# Altium PCB egg.PcbDoc (part 3 of 3)
Units mil, origin at the board's own origin, x right, y up, seen from the top; angles counter-clockwise.
Board outline 3110.24 x 2637.8 mil, 4 copper layers (Top Layer, GND, PWR, Bottom Layer), stack 30.634 mil thick; 262 components, 132 nets, 710 pads, 642 vias.
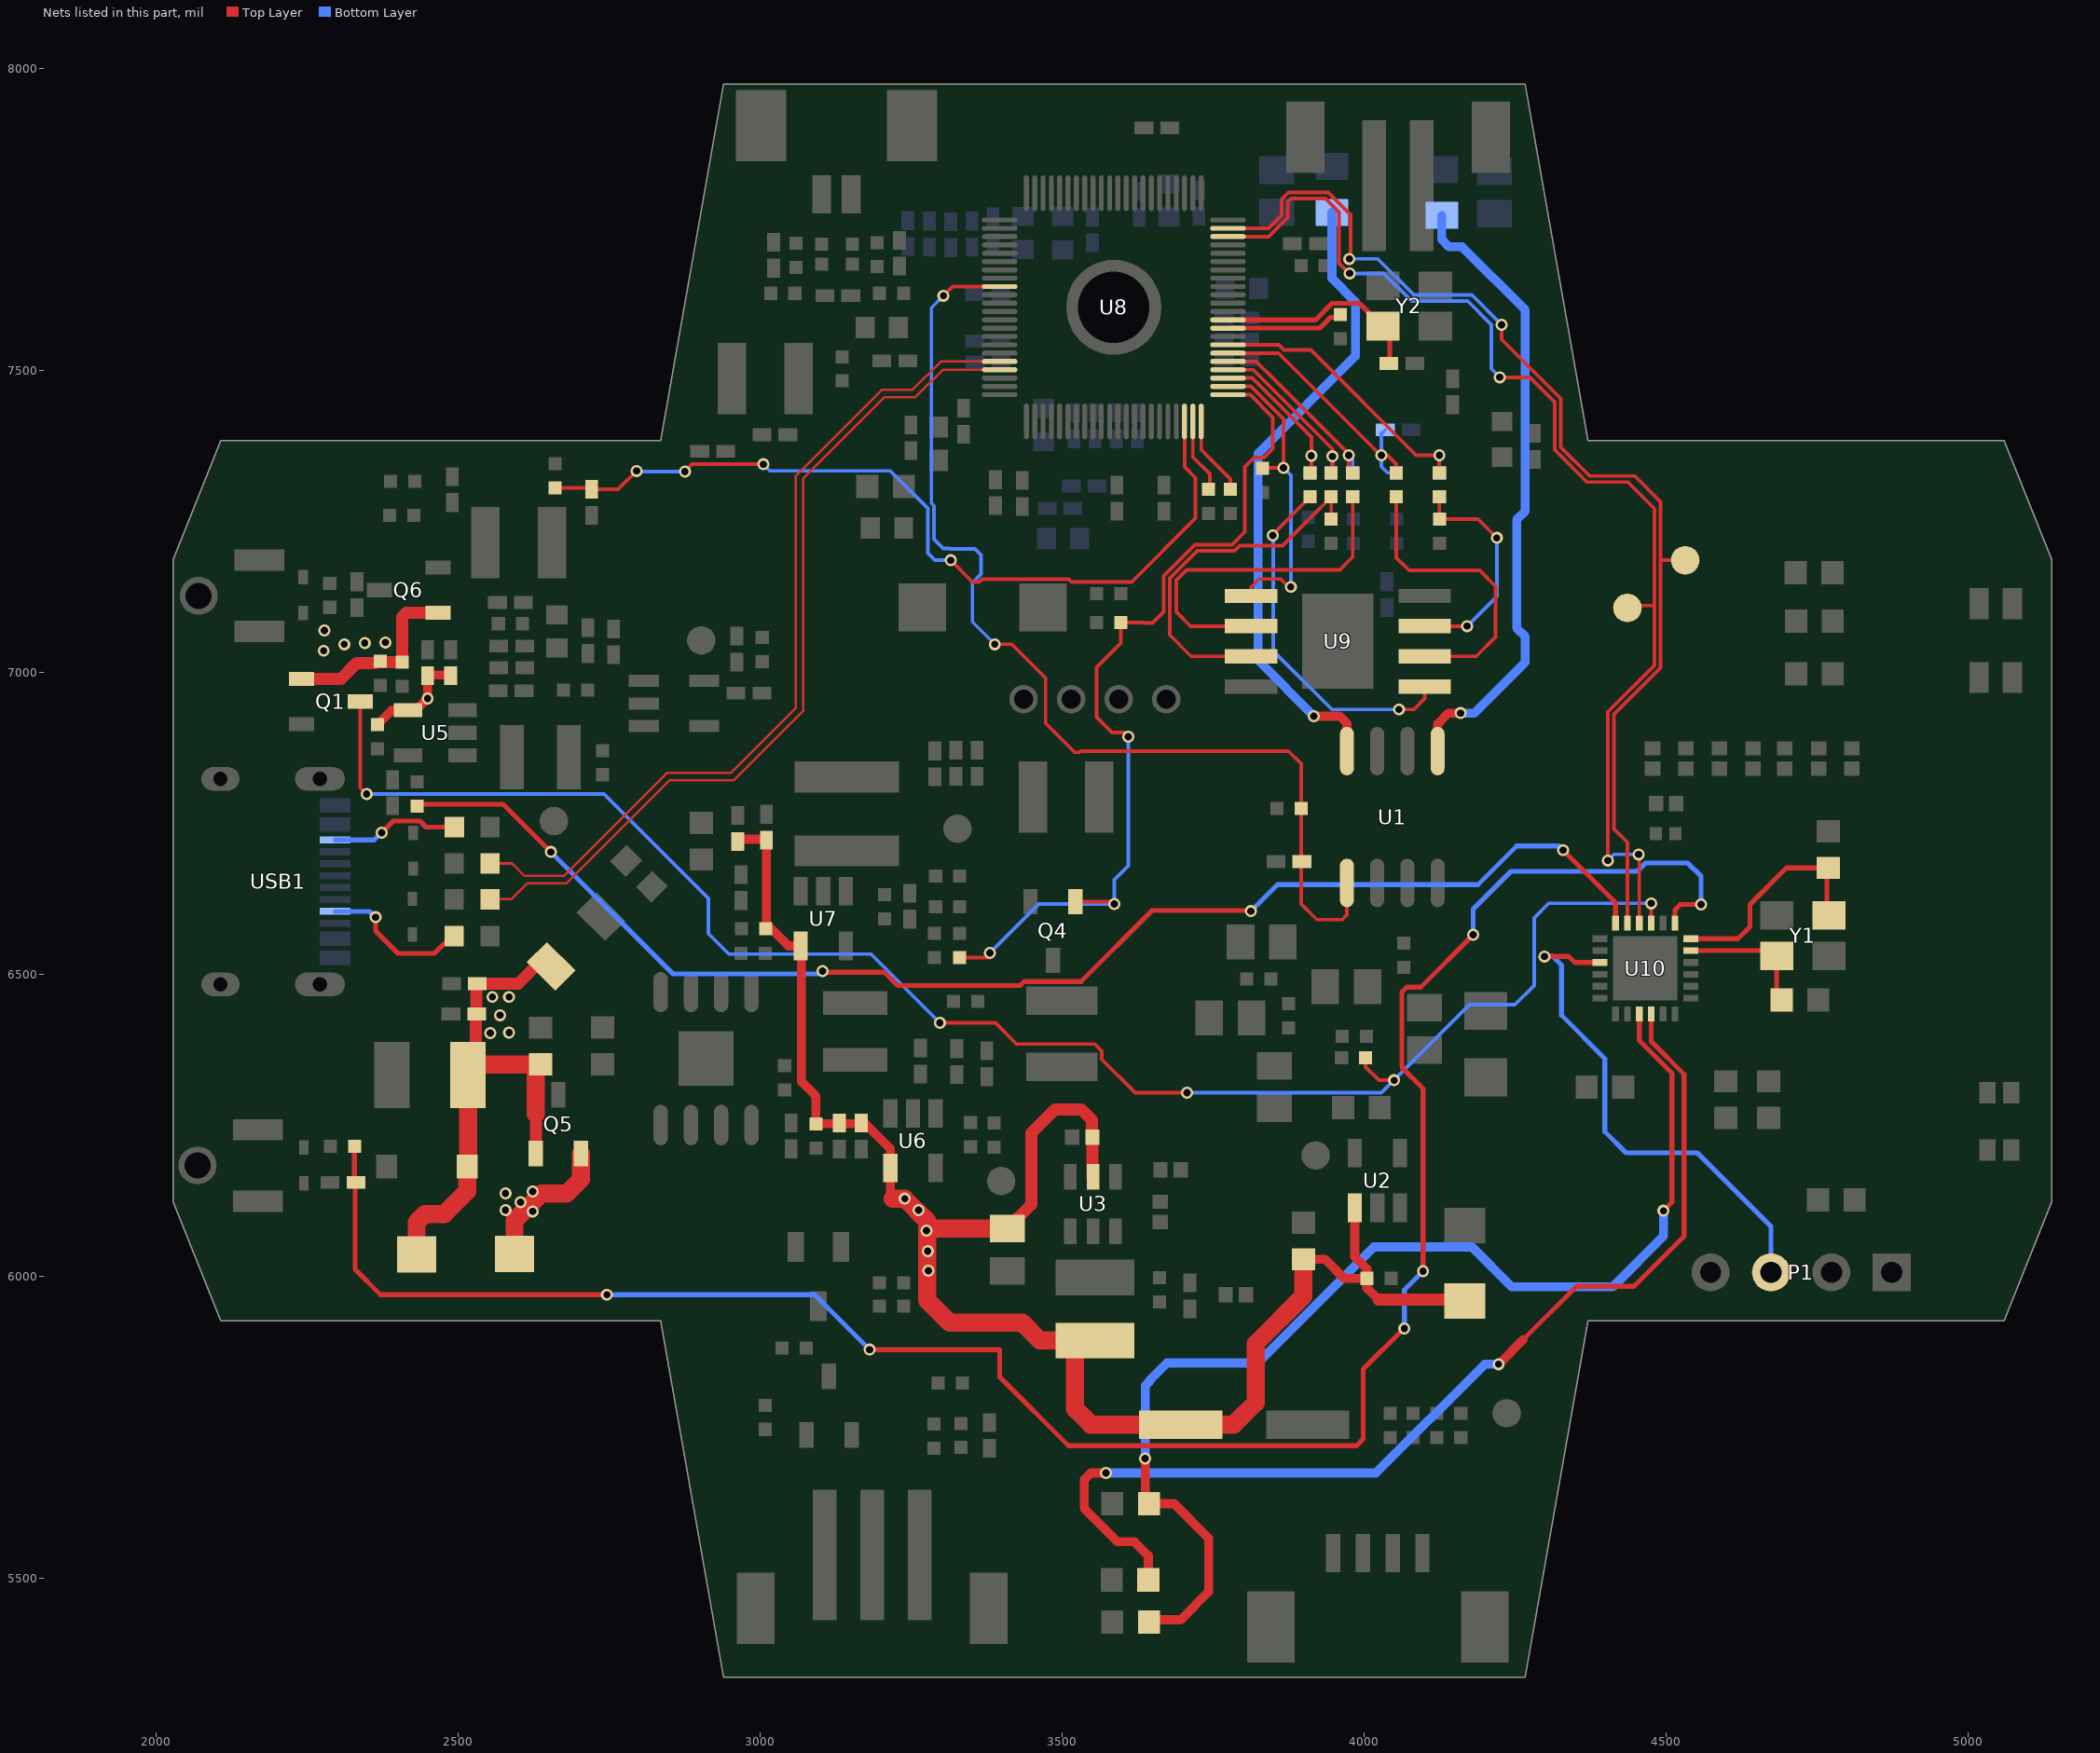
[diagram p5: the nets of this part, all layers, seen from the top]

## Via types
v1: diameter 20, hole 12, Top Layer to Bottom Layer, tented both sides, 642 vias

## Nets (pads, with @x,y where several pads share a name; then routed paths per layer and width w, separated by ;. In a path a pad name is that pad's centre, name@x,y a point inside that pad or via, vN(x,y) a via of type N, cw(c..) or ccw(c..) an arc to the next point about the centre after c; other vN are vias at no path point) (continued)
NTC_AD: C105.2 R79.2 U10.9 | length 1942.5
  Top Layer w8: U10.9@4456,6434 4456,6389.97 4510,6335.97 4510,6122 v1(4496,6108)
  Top Layer w15: v1(3638,5698) 3638,5630.81 3645,5623.81 C105.2@3644.19,5623 3686,5623 3743,5566 3743,5477 3697,5431 3648.37,5431 R79.2@3644.19,5426.82
  Bottom Layer w15: v1(3638,5698) 3638,5818.19 3645,5825.19 3644.19,5826 3674,5855.81 3824.19,5855.81 4016.38,6048 4179,6048 4245,5982 4412,5982 4496,6066 v1(4496,6108)
NTC_CON: R78.1 U10.10 | length 1776.8
  Top Layer w8: 4264,5895 4352,5983 4447,5983 4530,6066 4530,6334 4475.7,6388.3 U10.10@4475.7,6434
  Top Layer w15: v1(3573,5674) 3548,5674 3537.18,5663.18 3537.18,5614.82 3592,5560 3620,5560 3643.19,5536.81 R78.1@3643.19,5496.82 ; v1(4223,5854) 4264,5895
  Bottom Layer w15: v1(3573,5674) 4020,5674 4200,5854 v1(4223,5854)
PM_GPIO4: Q4.1 R46.1 R48.1 U8.23 | length 1498.3
  Top Layer w6: R46.1@3331,6527 v1@3381,6527 ; Q4.1@3526.57,6616 Q4.1@3522.66,6619.91 3583.09,6619.91 v1(3587,6616) ; v1(3610,6893) 3603.3,6899.7 3583.26,6899.7 3557.63,6925.33 3557.63,7007.89 3597.63,7047.89 R48.1@3597.63,7082 3634.96,7082 3635.96,7081 3650.04,7081 3668.43,7099.38 3668.43,7159.17 3720.25,7211 3782,7211 3803,7232 3803,7339.55 3818.27,7354.83 3834.68,7354.83 3849.46,7369.61 3849.46,7421.54 3811.9,7459.1 U8.23@3775,7459.1
  Bottom Layer w6: v1(3381,6535) 3462,6616 v1(3587,6616) 3587,6656 3610,6679 v1(3610,6893)
PM_RESET: C86.2 R55.1 U8.20 | length 1420.6
  Top Layer w6: R55.1@2661,7304.97 2714.6,7304.97 C86.2@2721.63,7312 ; C86.2@2721.63,7302.46 2765.46,7302.46 v1(2796,7333) ; v1(2876,7332) 2888,7344 v1(3006,7344) ; v1(3315.96,7185) 3351.96,7149 3363.1,7149 3367.47,7153.37 3511.27,7153.37 3515.64,7149 3615.83,7149 3721.36,7254.53 3721.36,7321.47 3703.15,7339.68 U8.20@3703.15,7414.81
  Bottom Layer w6: v1(2796,7333) 2797,7332 v1(2876,7332) ; v1(3006,7344) 3017,7333 3216,7333 3278,7271 3278,7197 3290,7185 v1(3315.96,7185)
PM_SPI_CZ: R70.2 U8.24 U9.1 | length 524.1
  Top Layer w6: U8.24@3775,7472.88 3813.12,7472.88 3866.87,7419.13 v1(3866.87,7338) 3833,7338 R70.2@3832,7337 ; U9.1@3813.3,7126 3813.3,7140.92 3826.38,7154 3862,7154 3875.08,7140.92 v1(3879,7140.92)
  Bottom Layer w6: v1(3866.87,7338) 3879,7325.87 v1(3879,7140.92)
PM_SPI_DI: R60.1 R84.2 U8.25 | length 267.2
  Top Layer w6: U8.25@3775,7486.66 3815.01,7486.66 3913,7388.67 v1(3913,7358) 3913,7331.86 R60.1@3911.02,7329.87
  Bottom Layer w6: R84.2@3911.02,7329.87 3913,7331.86 v1(3913,7358)
PM_SPI_DO: R62.1 R65.2 U8.27 | length 329.1
  Top Layer w6: U8.27@3775,7514.22 3821.78,7514.22 3849,7487 ; 3849,7486.96 3858.96,7477 ; 3859,7477 3975,7361 v1(3975,7359) 3975,7336.38 R62.1@3981.51,7329.87
  Bottom Layer w6: v1(3975,7359) 3981.51,7352.49 R65.2@3981.51,7329.87
PM_SPI_HOLD: R66.1 R85.2 U8.29 | length 484
  Top Layer w6: U8.29@3775,7541.78 3859.18,7541.78 3867.96,7533 3912.43,7533 4086.43,7359 v1(4125,7359) R66.1@4125,7329.87
  Bottom Layer w6: R85.2@4125,7329.87 v1(4125,7359)
PM_SPI_SCK: C98.2 R58.1 R83.2 U8.28 | length 462
  Top Layer w6: U8.28@3775,7528 3858.82,7528 3864.82,7522 4027.82,7359 v1(4029,7359) 4039,7359 4053.85,7344.15 R58.1@4053.85,7329.87
  Bottom Layer w6: C98.2@4035.54,7401 4029,7394.46 v1(4029,7359) 4029,7340 4039.13,7329.87 R83.2@4053.85,7329.87
PM_SPI_WPZ: R61.2 R64.1 U8.26 | length 295.5
  Top Layer w6: U8.26@3775,7500.44 3816.84,7500.44 3948,7369.28 v1(3948,7357) 3948,7331.9 R64.1@3945.97,7329.87
  Bottom Layer w6: R61.2@3945.97,7329.87 3948,7331.9 v1(3948,7357)
POWER_EN: R38.2 U10.24 | length 2287.5
  Top Layer w8: R38.2@2433,6778 2436,6781 2575,6781 v1(2654,6702) ; v1(3104,6505) 3106.17,6502.83 3206.17,6502.83 3228,6481 3431.19,6481 3437.69,6487.5 3531.75,6487.5 3649.25,6605 3812,6605 v1(3813,6604) ; v1@4330,6710 v1(4330,6705) 4416.7,6618.3 U10.24@4416.7,6584.5
  Bottom Layer w8: v1(2654,6702) 2856,6500 3099,6500 v1(3104,6505) ; v1(3813,6604) 3857,6648 4189,6648 4253,6712 4323,6712 v1(4330,6705)
RESET: C32.2 R25.2 U10.19 | length 3552
  Top Layer w8: R25.2@2329,6215 2329,6156 2330,6155 2330,6011 2372,5969 v1(2747,5969) ; v1(3182,5878) 3397.05,5878 3397.05,5832.83 3510.87,5719 3988,5719 3999,5730 3999,5846 v1@4065,5912 ; v1(4098,6008) 4098,6310.32 4063.74,6344.57 4063.74,6347.13 4063.06,6347.81 4063.06,6470.19 4071.05,6478.17 4094.17,6478.17 v1(4181,6565) ; U10.19@4515.1,6584.5 4515.1,6606.1 4524,6615 v1(4558,6615)
  Bottom Layer w8: v1(2747,5969) 3091,5969 v1(3182,5878) ; v1(4067,5913) 4067,5977 v1(4098,6008) ; v1(4181,6565) 4181,6607.6 4243.4,6670 4452.46,6670 4466.46,6684 4536,6684 4558,6662 v1(4558,6615)
RX_SOC: RX.1 U8.42 U10.22 | length 1928.6
  Top Layer w6: U8.42@3775,7720.91 3842.36,7720.91 3873.65,7752.2 3873.65,7778.43 3879.22,7783.99 3936.63,7783.99 3959,7761.62 3959,7676.96 3975.96,7660 v1(3976.5,7660) ; v1(4225,7488) 4275,7488 4316,7447 4316,7368 4369.46,7314.54 4437.07,7314.54 4481,7270.61 4481,7110 ; v1(4404.07,6688) 4404,6688.07 4404,6934.14 4481,7011.14 4481,7110 ; RX.1@4436.3,7106 4440.3,7110 4481,7110 ; v1(4455,6698) 4456,6697 U10.22@4456,6584.5
  Bottom Layer w6: v1(3976.5,7660) 4032.86,7660 4078.86,7614 4172,7614 4211,7575 4211,7502 v1(4225,7488) ; v1(4404.07,6688) 4414.07,6698 v1(4455,6698)
SPI_FLASH-HOLD: R66.2 R68.2 U9.7 | length 381
  Top Layer w6: U9.7@4100.7,7076 v1(4171,7076) ; R66.2@4125,7289.87 4125,7253.49 R68.2@4125.49,7253 4189,7253 v1(4220,7222)
  Bottom Layer w6: v1(4171,7076) 4220,7125 v1(4220,7222)
SPI_FLASH-SCK: R58.2 U9.6 | length 498.8
  Top Layer w6: R58.2@4053.85,7289.87 4053.85,7189.15 4074.86,7168.14 4191.63,7168.14 4218,7141.77 4218,7058 4186,7026 U9.6@4100.7,7026
SPI_FLASH-SDI: R60.2 U9.5 | length 599.3
  Top Layer w6: v1(3849,7226) 3849,7227.86 R60.2@3911.02,7289.87 ; v1(4058,6938) 4082.7,6938 4100.7,6956 U9.5@4100.7,6976
  Bottom Layer w6: v1(3849,7226) 3849.87,7225.13 3849.87,7035.13 3947,6938 v1(4058,6938)
SPI_FLASH-SDO: R62.2 U9.2 | length 593.4
  Top Layer w6: U9.2@3813.3,7076 3713,7076 3689.37,7099.63 3689.37,7151.83 3706.54,7169 3960,7169 3981.51,7190.51 R62.2@3981.51,7289.87
SPI_FLASH-WPN: R64.2 R67.2 U9.3 | length 650.7
  Top Layer w6: U9.3@3813.3,7026 3713.84,7026 3678.43,7061.41 3678.43,7155.03 3724.39,7201 3786.14,7201 3794.14,7209 3865.1,7209 R64.2@3945.97,7289.87 ; 3912.55,7256.45 R64.2@3945.97,7289.87 ; R67.2@3945.97,7253 R64.2@3945.97,7289.87
SPK_OUTN: L3.1 U1.5 | length 1053.4
  Top Layer w15: U1.5@4122,6869.15 4122,6914 4140,6932 v1(4160,6932)
  Bottom Layer w15: L3.1@4129,7755.96 4129,7716 4141,7704 4162.41,7704 4267,7599.41 4267,7266.19 4253,7252.19 4253,7073 4267,7059 4267,7016 4183,6932 v1(4160,6932)
SPK_OUTP: L2.1 U1.8 | length 1060.6
  Top Layer w15: v1(3917.2,6927) 3960,6927 3972,6915 U1.8@3972,6869.15
  Bottom Layer w15: v1(3917.2,6927) 3825,7019.2 3825,7362 3986,7523 3986,7613 3947,7652 L2.1@3947,7760.96
SPK_SHDN: C8.1 R4.1 U1.1 U8.75 | length 1781.2
  Top Layer w6: v1(3304,7623) 3319.24,7638.24 U8.75@3397.05,7638.24 ; v1(3389,7046) 3417,7046 3473,6990 3473,6915 3521,6867 3529.46,6867 3531.46,6869 3875,6869 3896,6848 R4.1@3896,6774 3896,6616.11 3922.11,6590 3964.09,6590 3972,6597.91 U1.1@3972,6650.85
  Bottom Layer w6: v1(3304,7623) 3284,7603 3284,7279.14 3288,7275.14 3288,7220 3303.43,7204.57 3313.57,7204.57 3314.14,7204 3356.04,7204 3366,7194.04 3366,7161.89 3352,7147.89 3352,7083 v1(3389,7046) v1@3388,7045
SWS: P1.3 U10.3 | length 851.4
  Top Layer w8: v1(4299,6529) 4339,6529 4348.9,6519.1 U10.3@4390.6,6519.1
  Bottom Layer w8: v1(4299,6529) 4313,6529 4327,6515 4327,6432 4399.02,6359.98 4399.02,6238.98 4434,6204 4552,6204 4674,6082 P1.3@4674,6006
TX_SOC: TX.1 U8.43 U10.23 | length 1854.5
  Top Layer w6: U8.43@3775,7734.69 3842,7734.69 3863.65,7756.35 3863.65,7782.57 3875.08,7793.99 3940.77,7793.99 3978,7756.76 3978,7686 v1(3976,7684) ; v1(4228,7575) 4228,7550.62 4326,7452.62 4326,7372.15 4373.61,7324.54 4448.46,7324.54 4491,7282 4491,7185.16 ; U10.23@4436.3,6584.5 4436.3,6718.06 4414,6740.36 4414,6930 4491,7007 4491,7185.16 ; TX.1@4532,7185.16 4491,7185.16
  Bottom Layer w6: v1(3976,7684) 4023,7684 4083,7624 4179,7624 v1(4228,7575)
UART_RX0: R56.2 U8.21 | length 124.9
  Top Layer w6: U8.21@3716.93,7414.81 3716.93,7355.88 3745,7327.81 3745,7304.75 R56.2@3742.7,7302.45
UART_TX0: R57.2 U8.22 | length 132.4
  Top Layer w6: U8.22@3730.71,7414.81 3730.71,7368 3743.71,7355 3779,7319.71 R57.2@3779,7302.45
USB5V_BAT+: C15.2 C28.1 C29.2 C30.2 C37.2 C38.2 C43.2 C44.2 C53.2 C54.2 D8.2 L1.1 L7.2 Q5.2 R6.1 R30.2 R32.2 R41.2 U2.1 U3.2 U5.4 U6.4 U7.4 | length 3343.1
  Top Layer w15: R30.2@2367,6913 2390.73,6936.73 U5.4@2417.62,6936.73 2430.73,6936.73 v1(2450.05,6956.05) C37.2@2450.05,6995.26 ; C37.2@2450.08,6995.23 C38.2@2488.05,6995.23 ; C54.2@2963.5,6721 2965.5,6723 3011,6723 C53.2@3011,6721.54 3011,6576 R41.2@3010,6575 3018.85,6575 3047.4,6546.45 U7.4@3067.6,6546.45 3069,6545.05 3069,6322 3092.83,6298.17 R32.2@3092.83,6251.98 3175.02,6251.98 3216.1,6210.9 U6.4@3216.1,6178.62 3216.1,6131.9 3220,6128 ; C15.2@3900,6027.69 3935.62,6027.69 3967.3,5996 R6.1@4005,5996 ; U2.1@3984.93,6112.83 3984.93,6031.93 4005,6011.86 R6.1@4005,5996 ; 4024,5961 4005,5980 R6.1@4005,5996
  Top Layer w20: C29.2@3410,6078.72 3449.57,6118.29 3449.57,6236.57 3489,6276 3532,6276 3550,6258 3550,6230.73 C30.2@3550.73,6230 3550.73,6165.28 U3.2@3551.6,6164.42 ; 4024,5961 4164.3,5961 L1.1@4167,5958.3
  Top Layer w30: D8.2@2593.94,6036.39 2593.94,6091.94 2638.23,6136.23 2680,6136.23 2703.88,6160.11 Q5.2@2703.88,6202.69 ; 3220,6128 v1(3240,6128) 3277,6091 ; C29.2@3410,6078.72 3277,6078.72 3277,5959.9 3313.9,5923 3434,5923 3463.84,5893.16 L7.2@3555,5893.16 ; L7.2@3521.92,5865 3521.92,5780.08 3548.1,5753.9 C28.1@3696.9,5753.9 3784.63,5753.9 3821,5790.27 3821,5888 3900,5967 C15.2@3900,6027.69
  other v1: 3279,6008.8 3278,6041 3276,6075 2624,6107 2579,6109 3263,6109 2604,6122 2579,6137 2624,6139.68
USB_5V: C101.1 C102.1 D7.1 D8.1 F1.2 Q1.1 Q5.1 Q6.1 R11.1 R74.2 R75.2 R82.1 | length 1217.6
  Top Layer w20: Q1.1@2241.29,6988.66 2306.66,6988.66 2333,7015 2365,7015 2366,7016 R82.1@2408,7016 ; R82.1@2408,7017.87 2408,7091.34 2414.74,7098.08 Q6.1@2467.31,7098.08 ; F1.2@2516.98,6333 2530,6346.02 2530,6434 2531,6435 2531,6484 2600,6484 2628.67,6512.67 R74.2@2654.67,6512.67 ; 2628.74,6268.4 2629.08,6268.06 Q5.1@2629.08,6202.69
  Top Layer w30: D8.1@2431.94,6035.39 2431.94,6088.94 2445.74,6102.74 2477.74,6102.74 2515.59,6140.59 D7.1@2515.59,6181.1 2516.98,6182.49 F1.2@2516.98,6333 ; F1.2@2530,6346.02 2534.35,6350.37 R75.2@2637,6350.37 2628.74,6342.11 2628.74,6268.4
  other v1: 2554,6402 2585,6403 2569.83,6431.74 2557.26,6462 2585,6462 2278,7035.26 2312,7046 2346,7048 2380,7049 2279,7069
USB_CC1: R76.1 USB1.A5 | length 247.8
  Top Layer w8: v1(2364,6594) 2364,6571 2401,6534 2461.33,6534 R76.1@2490.33,6563
  Bottom Layer w8: USB1.A5@2296.88,6603.79 2354.21,6603.79 v1(2364,6594)
USB_CC2: R77.1 USB1.B5 | length 211
  Top Layer w8: v1(2374,6734) 2393.34,6753.34 2437.19,6753.34 2447.52,6743 R77.1@2490.54,6743
  Bottom Layer w8: USB1.B5@2296.88,6721.9 2361.9,6721.9 v1(2374,6734)
USB_DEC: Q1.3 R7.2 U10.21 | length 2836.7
  Top Layer w6: Q1.3@2338.54,6951.26 2338.54,6808.46 v1(2349,6798) ; v1(3298,6419) 3390,6419 3425,6384 3554.4,6384 3566,6372.4 3566,6358.54 3621.3,6303.24 v1(3707.13,6303.24) ; R7.2@4003,6361.13 4003,6346 4025,6324 v1(4050,6324) ; U10.21@4475.7,6584.5 v1(4475.7,6617)
  Bottom Layer w6: v1(2349,6798) 2742.3,6798 2915,6625.3 2915,6566.96 2948.96,6533 3184,6533 v1(3298,6419) ; v1(3707.13,6303.24) 4029.24,6303.24 v1(4050,6324) ; v1@4045.89,6328.11 v1(4050,6324) ; v1(4475.7,6617) 4306,6617 4282,6593 4282,6481 4250,6449 4175,6449 v1(4050,6324)
USB_DM: R71.2 U8.84 | length 1426.2
  Top Layer w4: R71.2@2557.26,6683 2590,6683 2610.5,6662.5 2675.68,6662.5 2846.18,6833 2952,6833 3059.6,6940.6 3059.6,7324.97 3201.63,7467 3252.31,7467 3299.53,7514.22 U8.84@3397.05,7514.22
USB_DP: R73.2 U8.85 | length 1428
  Top Layer w4: R73.2@2557.26,6623.86 2588.86,6623.86 2615.5,6650.5 2680.65,6650.5 2851.15,6821 2956.97,6821 3071.6,6935.63 3071.6,7097.13 3071.6,7320 3206.6,7455 3257.28,7455 3302.72,7500.44 U8.85@3397.05,7500.44
XC1: C22.2 U10.18 Y1.1 | length 378.3
  Top Layer w8: U10.18@4541.1,6558.4 4619.4,6558.4 4639,6578 4639,6615.11 4699.57,6675.69 C22.2@4766.69,6675.69 ; C22.2@4769,6675.69 C22.2@4766.69,6675.69 ; Y1.1@4770,6597 4766.69,6600.31 C22.2@4766.69,6675.69
XC2: C23.2 U10.17 Y1.3 | length 244.8
  Top Layer w8: U10.17@4541.1,6538.8 4670.88,6538.8 Y1.3@4683.38,6526.3 ; Y1.3@4683.38,6530.07 Y1.3@4683.38,6526.3 ; C23.2@4688.69,6444 4683.38,6449.31 Y1.3@4683.38,6526.3 ; Y1.3@4689.82,6519.85 Y1.3@4683.38,6526.3
XTALI: R53.2 U8.31 | length 195.5
  Top Layer w8: U8.31@3775,7569.34 3775.2,7569.53 3927.1,7569.53 3944.97,7587.41 3957.18,7587.41 R53.2@3961.31,7591.53
XTALO: C72.2 U8.32 Y2.1 | length 349.9
  Top Layer w8: U8.32@3775,7583.12 3919.93,7583.12 3947.17,7610.36 3992.64,7610.36 4030.47,7572.53 Y2.1@4031.69,7572.53 4043,7561.23 C72.2@4043,7511
pads on no net: CON3.4 CON3.5 CON4.5 CON4.6 MIC.3 MIC.4 P1.1 SPK.3 SPK.4 U1.3 U2.4 U4.4 U8.3 U8.4 U8.13 U8.14 U8.17 U8.34 U8.35 U8.36 U8.37 U8.44 U8.45 U8.47 U8.48 U8.50 U8.51 U8.52 U8.53 U8.54 U8.55 U8.56 U8.57 U8.58 U8.59 U8.60 U8.61 U8.62 U8.63 U8.64 U8.65 U8.73 U8.77 U8.78 U8.79 U8.80 U8.81 U8.82 U10.25 U11.6 USB1.A8 USB1.B8

## Polygon pours and split planes (outlines as drawn)
DGND on Top Layer "Top Layer-DGND" (solid, remove dead copper, pour order 22): 2940,7973 2860,7519.3 2835.87,7382.45 2107.52,7382.45 2066.63,7280.2 2028.78,7185.6 2028.78,6122.63 2107.52,5925.76 2835.87,5925.76 2915,5478.2 2940,5335.2 4267.17,5335.2 4345,5776.58 4371.3,5925.76 4837,5925.76 4837,7382.45 4371.3,7382.45 4303,7765.2 4267.17,7973 2940,7973 2937.8,7975.2
DGND on Bottom Layer "Bottom Layer-DGND" (solid, remove dead copper, pour order 20): 2940,7974 2860,7520.3 2835.87,7383.45 2107.52,7383.45 2066.63,7281.2 2028.78,7186.6 2028.78,6123.63 2107.52,5926.76 2835.87,5926.76 2915,5479.2 2940,5336.2 4267.17,5336.2 4345,5777.58 4371.3,5926.76 4840,5926.76 4840,7383.45 4371.3,7383.45 4303,7766.2 4267.17,7974 2940,7974 2937.8,7976.2
no net on Mechanical 1 (solid): 1991,7321
DGND on GND (split plane): 4351.47,7379.35 4351.52,7379.14 4351.55,7378.92 4352.05,7377.25 4352.53,7375.56 4352.63,7375.36 4352.69,7375.15 4353.52,7373.61 4354.31,7372.05 4354.44,7371.87 4354.55,7371.68 4355.66,7370.32 4356.74,7368.95 4356.91,7368.8 4357.05,7368.63 4358.4,7367.52 4359.73,7366.38 4359.92,7366.27 4360.09,7366.13 4361.63,7365.31 4363.16,7364.45 4363.37,7364.38 4363.57,7364.28 4365.24,7363.77 4366.91,7363.22 4367.13,7363.2 4367.34,7363.13 4369.08,7362.96 4370.82,7362.75 4371.04,7362.77 4371.26,7362.75 4831,7362.75 4831,5946.25 4371.26,5946.25 4371.04,5946.23 4370.82,5946.24 4369.08,5946.03 4367.34,5945.86 4367.13,5945.8 4366.91,5945.77 4365.24,5945.23 4363.57,5944.72 4363.37,5944.61 4363.16,5944.55 4361.63,5943.69 4360.09,5942.86 4359.92,5942.72 4359.73,5942.61 4358.4,5941.47 4357.05,5940.36 4356.91,5940.19 4356.74,5940.05 4355.66,5938.67 4354.55,5937.32 4354.44,5937.12 4354.31,5936.95 4353.52,5935.39 4352.69,5933.84 4352.63,5933.63 4352.53,5933.43 4352.05,5931.75 4351.55,5930.07 4351.52,5929.85 4351.47,5929.64 4250.26,5355.7 2956.82,5355.7 2855.62,5929.64 2855.56,5929.85 2855.53,5930.07 2855.03,5931.75 2854.55,5933.43 2854.45,5933.63 2854.39,5933.84 2853.56,5935.39 2852.77,5936.95 2852.64,5937.12 2852.53,5937.32 2851.42,5938.67 2850.34,5940.05 2850.17,5940.19 2850.03,5940.36 2848.68,5941.47 2847.35,5942.61 2847.16,5942.72 2846.99,5942.86 2845.45,5943.69 2843.92,5944.55 2843.71,5944.61 2843.51,5944.72 2841.84,5945.23 2840.17,5945.77 2839.95,5945.8 2839.74,5945.86 2838,5946.03 2836.26,5946.24 2836.04,5946.23 2835.82,5946.25 2121.08,5946.25 2048.83,6126.87 2048.83,7182.12 2121.08,7362.75 2835.82,7362.75 2836.04,7362.77 2836.26,7362.75 2838,7362.96 2839.74,7363.13 2839.95,7363.2 2840.17,7363.22 2841.84,7363.77 2843.51,7364.28 2843.71,7364.38 2843.92,7364.45 2845.45,7365.31 2846.99,7366.13 2847.16,7366.27 2847.35,7366.38 2848.68,7367.52 2850.03,7368.63 2850.17,7368.8 2850.34,7368.95 2851.42,7370.32 2852.53,7371.68 2852.64,7371.87 2852.77,7372.05 2853.56,7373.61 2854.39,7375.15 2854.45,7375.36 2854.55,7375.56 2855.03,7377.25 2855.53,7378.92 2855.56,7379.14 2855.62,7379.35 2956.82,7953.3 4250.26,7953.3
USB5V_BAT+ on PWR (split plane): 2493.9,6966.89 2493.9,6379.94 2493.4,6379.6 2492.29,6377.95 2491.9,6376 2492.29,6374.05 2493.4,6372.4 2493.9,6372.06 2493.9,6321 2494.29,6319.05 2495.4,6317.4 2645.4,6167.4 2647.05,6166.29 2649,6165.9 2840.26,6165.9 2838.22,6163.42 2829.82,6150.85 2827.96,6147.37 2822.18,6133.4 2821.48,6131.11 2821.03,6129.63 2818.08,6114.8 2817.73,6111.26 2817.7,6110.88 2817.7,6103.32 2817.7,6095.75 2817.73,6095.37 2818.08,6091.83 2821.03,6077 2821.48,6075.52 2822.18,6073.23 2827.96,6059.26 2829.82,6055.79 2838.22,6043.21 2840.72,6040.17 2851.41,6029.47 2853.91,6027.42 2854.46,6026.97 2867.03,6018.57 2868.71,6017.67 2870.51,6016.71 2884.48,6010.93 2886.23,6010.4 2888.25,6009.78 2903.08,6006.83 2906.23,6006.52 2907,6006.45 2922.13,6006.45 2922.51,6006.49 2926.05,6006.83 2940.88,6009.78 2942.36,6010.23 2944.65,6010.93 2958.62,6016.71 2962.09,6018.57 2974.67,6026.97 2977.71,6029.47 2988.41,6040.17 2990.46,6042.67 2990.91,6043.21 2999.31,6055.79 3000.21,6057.47 3001.16,6059.26 3006.95,6073.23 3008.1,6077 3011.05,6091.83 3011.43,6095.75 3011.43,6103.32 3011.43,6110.88 3011.05,6114.8 3008.1,6129.63 3006.95,6133.4 3001.16,6147.37 3000.21,6149.17 2999.31,6150.85 2993.26,6159.9 3260.89,6159.9 3308.9,6111.89 3308.9,5979.1 3241,5979.1 3239.05,5978.71 3237.4,5977.6 3219.89,5960.1 2909,5960.1 2907.05,5959.71 2905.4,5958.6 2879.89,5933.1 2854.65,5933.1 2854.55,5933.43 2854.45,5933.63 2854.39,5933.84 2853.56,5935.39 2852.77,5936.95 2852.64,5937.12 2852.53,5937.32 2851.42,5938.67 2850.34,5940.05 2850.17,5940.19 2850.03,5940.36 2848.68,5941.47 2847.35,5942.61 2847.16,5942.72 2846.99,5942.86 2845.45,5943.69 2843.92,5944.55 2843.71,5944.61 2843.51,5944.72 2841.84,5945.23 2840.17,5945.77 2839.95,5945.8 2839.74,5945.86 2838,5946.03 2836.26,5946.24 2836.04,5946.23 2835.82,5946.25 2604.96,5946.25 2523.1,6028.11 2523.1,6126 2522.71,6127.95 2521.6,6129.6 2425.1,6226.11 2425.1,6881 2424.71,6882.95 2423.6,6884.6 2408.6,6899.6 2406.95,6900.71 2405,6901.1 2281.11,6901.1 2264.1,6918.11 2264.1,6955.8 2280.2,6971.9 2488.89,6971.9
3V3_CPU on PWR (split plane): 296 vertices, not listed, extent 2048.83,5355.7 4831,7953.3
USB_5V on PWR (split plane): 2610.9,7066.89 2610.9,6383.11 2608.89,6381.1 2504.1,6381.1 2504.1,6969 2503.71,6970.95 2502.6,6972.6 2494.6,6980.6 2492.95,6981.71 2491,6982.1 2278.09,6982.1 2276.14,6981.71 2274.48,6980.6 2256.54,6962.67 2256.1,6963.11 2256.1,7080.89 2315.71,7140.5 2537.29,7140.5
3V3_NORMAL on PWR (split plane): 3020.9,7586.89 3020.9,7419.11 2980,7378.21 2978.9,7376.56 2978.51,7374.61 2978.51,7252.45 2977.14,7254.49 2976.02,7255.86 2974.65,7257.53 2966.42,7265.76 2964.75,7267.13 2963.37,7268.26 2953.7,7274.72 2950.23,7276.58 2939.48,7281.03 2935.71,7282.17 2924.3,7284.44 2920.38,7284.83 2908.75,7284.83 2904.83,7284.44 2893.42,7282.17 2892.27,7281.83 2889.65,7281.03 2878.9,7276.58 2875.43,7274.72 2865.75,7268.26 2864.38,7267.13 2862.71,7265.76 2854.48,7257.53 2853.11,7255.86 2851.98,7254.49 2845.52,7244.82 2843.66,7241.34 2839.21,7230.59 2838.86,7229.45 2838.07,7226.82 2835.8,7215.42 2835.45,7211.88 2835.41,7211.49 2835.41,7205.68 2835.41,7199.86 2835.45,7199.48 2835.8,7195.94 2838.07,7184.53 2838.86,7181.91 2839.21,7180.76 2843.66,7170.01 2845.52,7166.54 2851.98,7156.87 2853.11,7155.49 2854.48,7153.82 2862.71,7145.6 2864.38,7144.22 2865.75,7143.1 2875.43,7136.63 2878.9,7134.78 2889.65,7130.33 2890.79,7129.98 2893.42,7129.18 2904.83,7126.91 2908.36,7126.56 2908.75,7126.53 2920.38,7126.53 2920.77,7126.56 2924.3,7126.91 2935.71,7129.18 2938.34,7129.98 2939.48,7130.33 2950.23,7134.78 2953.7,7136.63 2963.37,7143.1 2964.75,7144.22 2966.42,7145.6 2974.65,7153.82 2975.37,7154.71 3482.9,7154.71 3482.9,7086.11 3476.06,7079.27 2854.65,7079.27 2852.7,7078.89 2851.04,7077.78 2849.94,7076.13 2849.55,7074.18 2849.55,6885.1 2849.83,6883.67 2849.83,6748.07 2850.22,6746.12 2851.33,6744.46 3074.9,6520.89 3074.9,6369.1 3000.11,6369.1 2988.1,6381.11 2988.1,6512 2987.71,6513.95 2986.6,6515.6 2754.1,6748.11 2754.1,6895 2754.1,7362.75 2835.82,7362.75 2836.04,7362.77 2836.26,7362.75 2838,7362.96 2839.74,7363.13 2839.95,7363.2 2840.17,7363.22 2841.84,7363.77 2843.51,7364.28 2843.71,7364.38 2843.92,7364.45 2845.45,7365.31 2846.99,7366.13 2847.16,7366.27 2847.35,7366.38 2848.68,7367.52 2850.03,7368.63 2850.17,7368.8 2850.34,7368.95 2851.42,7370.32 2852.53,7371.68 2852.64,7371.87 2852.77,7372.05 2853.56,7373.61 2854.39,7375.15 2854.45,7375.36 2854.55,7375.56 2855.03,7377.25 2855.53,7378.92 2855.56,7379.14 2855.62,7379.35 2897.5,7616.9 2990.89,7616.9
+5V_ULTRA on PWR (split plane): 3921.9,6164.89 3921.9,6028 3922.29,6026.05 3923.4,6024.4 4008.28,5939.51 4008.9,5939.09 4008.9,5591 4009.29,5589.05 4010.4,5587.4 4070.4,5527.4 4070.9,5527.06 4070.9,5415 4071.08,5414.1 3937.11,5414.1 3919.1,5432.11 3919.1,5936 3918.71,5937.95 3917.6,5939.6 3808.6,6048.6 3808.37,6048.76 3808.21,6049 3806.56,6050.11 3804.6,6050.49 3541.4,6050.49 3539.44,6050.11 3537.79,6049 3494.89,6006.1 3443.68,6006.1 3439.67,6010.11 3439.67,6136.46 3487.11,6183.9 3805,6183.9 3806.95,6184.29 3808.6,6185.4 3821.11,6197.9 3888.89,6197.9
3V3_BLE on PWR (split plane): 4827.9,6322.89 4827.9,5946.25 4371.26,5946.25 4371.04,5946.23 4370.82,5946.24 4369.08,5946.03 4367.34,5945.86 4367.13,5945.8 4366.91,5945.77 4365.24,5945.23 4363.57,5944.72 4363.37,5944.61 4363.16,5944.55 4361.63,5943.69 4360.09,5942.86 4359.92,5942.72 4359.73,5942.61 4358.4,5941.47 4357.05,5940.36 4356.91,5940.19 4356.74,5940.05 4355.66,5938.67 4354.55,5937.32 4354.44,5937.12 4354.31,5936.95 4353.52,5935.39 4352.69,5933.84 4352.63,5933.63 4352.53,5933.43 4352.05,5931.75 4351.55,5930.07 4351.52,5929.85 4351.47,5929.64 4250.26,5355.7 4096.51,5355.7 4078.1,5374.11 4078.1,5403.9 4082,5403.9 4083.95,5404.29 4085.6,5405.4 4086.71,5407.05 4087.1,5409 4086.71,5410.95 4085.6,5412.6 4081.1,5417.11 4081.1,5531 4080.71,5532.95 4079.6,5534.6 4077.95,5535.71 4076.14,5536.07 4019.1,5593.11 4019.1,5945.23 4018.71,5947.18 4017.6,5948.83 4015.95,5949.94 4014,5950.32 4012.24,5949.97 3932.1,6030.11 3932.1,6167 3931.71,6168.95 3930.6,6170.6 3903.31,6197.9 3945,6197.9 3946.95,6198.29 3948.6,6199.4 3995.34,6246.13 4043.33,6246.13 4117.9,6171.56 4117.9,5903.1 4115.95,5902.71 4114.3,5901.6 4113.19,5899.95 4112.8,5898 4113.19,5896.05 4114.3,5894.4 4115.95,5893.29 4117.9,5892.9 4221.05,5892.9 4223,5893.29 4224.65,5894.4 4329.6,5999.35 4330.71,6001 4331.1,6002.95 4331.1,6034.95 4332.12,6034.27 4335.59,6032.42 4346.34,6027.96 4347.48,6027.62 4350.11,6026.82 4361.52,6024.55 4365.05,6024.2 4365.44,6024.16 4377.07,6024.16 4377.46,6024.2 4380.99,6024.55 4392.4,6026.82 4395.03,6027.62 4396.17,6027.96 4406.92,6032.42 4410.39,6034.27 4420.07,6040.74 4421.44,6041.86 4423.11,6043.23 4431.34,6051.46 4432.71,6053.13 4433.84,6054.51 4440.3,6064.18 4442.16,6067.65 4446.61,6078.4 4447.41,6081.03 4447.75,6082.17 4450.02,6093.58 4450.41,6097.5 4450.41,6103.32 4450.41,6109.13 4450.02,6113.05 4447.75,6124.46 4447.41,6125.61 4446.61,6128.23 4442.16,6138.98 4440.3,6142.45 4434.89,6150.55 4527.65,6150.55 4529.6,6150.94 4531.25,6152.05 4721.11,6341.9 4808.89,6341.9
1V5_NORMAL on PWR (split plane): 3680.9,7238.62 3680.9,7120.04 3681.06,7119.27 3572.4,7010.6 3571.29,7008.95 3570.9,7007 3570.9,6740.02 3569.34,6739.71 3567.69,6738.6 3566.58,6736.95 3566.19,6735 3566.58,6733.05 3567.69,6731.4 3569.34,6730.29 3570.9,6729.98 3570.9,6397.1 3441.62,6397.1 3441.62,6442.41 3453.73,6454.52 3454.84,6456.18 3455.22,6458.13 3455.22,6478.89 3498.6,6522.27 3499.71,6523.92 3500.1,6525.87 3500.1,7002.35 3577.34,7079.59 3578.44,7081.25 3578.83,7083.2 3578.83,7162.93 3580.78,7163.32 3582.44,7164.43 3583.54,7166.08 3583.93,7168.03 3583.54,7169.98 3582.44,7171.64 3580.78,7172.74 3578.83,7173.13 3554.81,7173.13 3539.69,7188.25 3539.69,7244.48 3550.08,7254.87 3664.66,7254.87
3V3_FLASH on PWR (split plane): 4284.9,7263.05 4284.9,7261.16 4284.9,7250.2 4284.66,7249.73 4278.87,7235.76 4278.17,7233.48 4277.72,7231.99 4274.77,7217.16 4274.43,7213.63 4274.39,7213.24 4274.39,7205.68 4274.39,7198.12 4274.43,7197.73 4274.77,7194.2 4277.72,7179.36 4278.17,7177.88 4278.52,7176.73 4100.74,6998.95 4100,6999.1 4027.11,6999.1 4004.6,7021.6 4002.95,7022.71 4001,7023.1 3816.1,7023.1 3816.1,7321.06 4226.89,7321.06
1V0 on PWR (split plane): 3733.9,7452 3734.29,7450.05 3735.4,7448.4 3805.9,7377.89 3805.9,7122 3805.9,7020.11 3697.4,6911.6 3696.29,6909.95 3695.9,6908 3695.9,6758.11 3677.89,6740.1 3581.1,6740.1 3581.1,7004.89 3688.27,7112.06 3689.37,7113.71 3689.76,7115.66 3689.6,7116.43 3690.71,7118.09 3691.1,7120.04 3691.1,7240.73 3691.1,7311.74 3690.71,7313.69 3689.6,7315.35 3676.35,7328.6 3674.69,7329.71 3672.74,7330.1 3541.74,7330.1 3464.1,7407.74 3464.1,7443 3463.71,7444.95 3462.6,7446.6 3331.1,7578.11 3331.1,7819.89 3373.11,7861.9 3733.9,7861.9

## Other copper
Top Layer:
  region: 4903.73,6390.89 4903.73,6371.2 5113.43,6371.2 5113.43,6390.89
  region: 5097.83,6665.5 5097.83,6645.77 5113.03,6645.77 5113.03,6665.5
  rectangle: 5093.75,6371.2 5113.43,6481.7
  region: 4955.53,6482.59 4955.53,6462.9 5113.43,6462.9 5113.43,6482.59
  rectangle: 4955.55,6464.1 4975.23,6574.2
  region: 4956.53,6574.19 4956.53,6554.5 5113.03,6554.5 5113.03,6574.19
  rectangle: 5093.33,6555.4 5113.02,6665.5
  region: 4955.53,6665.39 4955.53,6645.7 5112.23,6645.7 5112.23,6665.39
  rectangle: 4955.55,6646.8 4975.23,6756.9
  region: 4958.73,6756.99 4958.73,6737.3 5112.93,6737.3 5112.93,6756.99
  rectangle: 5093.45,6737.3 5113.13,6941.8
  region net NetC21_2: 4808,6849.28 4808,6829.6 5101.63,6829.6 5101.63,6849.28
  region net DGND: 5104.73,6922.12 5104.73,6941.8 4824,6941.8 4824,6922.12
  pour cut-out: 4455,6712.27 4455.95,6711.32 4533.57,6711.32 4533.57,6818.55 4540.29,6825.27 4837,6825.27 4837,6892 4832,6897 4831,6896 4458.12,6896
  region net NetF1_1: 2163.87,6733 2076,6733 2076,6569 2077,6568 2170.57,6568
  region net USB_5V: 2531,6484 2530,6483 2530,6364 2627,6364 2598,6393 2598,6482 2600,6484
  region net USB5V_BAT+: 2624,6161 2592,6161 2561,6161 2561,6069 2570,6060 2571,6061 2647,6061 2644.4,6161
  region net USB_5V: 2296,7021 2276,7023 2256,7023 2256,7078 2263,7085 2296,7085 2296,7073 2311,7058 2312,7059 2395,7059 2399.39,7054.61 2408,7054.61 2408,7034.87 2388.13,7015 2333,7015
  region net 3V3_NORMAL: 2769,6909 2769,6824 2775,6818 2834,6877 2834,6910.18
  region net 3V3_NORMAL: 2938,7538 2934,7534 2901,7534 2901,7431 2904,7428 2907,7431 2941,7431
  region net 3V3_NORMAL: 3433,7146.05 3430.95,7144 3368,7144 3368,7092 3377,7083 3437,7083
  region net 1V5_NORMAL: 3446,6448 3444,6446 3444,6407 3552,6407 3557,6402 3557.5,6402.5 3557.5,6448.37
  region net +5V_ULTRA: 3937,5513 3937,5413 4079,5413 4084,5418 4079,5423 4079,5476 3968,5476 3962,5482 3962,5512
  region net +5V_ULTRA: 3785.77,6214.65 3909.55,6214.65 3914.8,6209.41 3914.8,6133.65 3795.2,6133.65 3789.8,6139.06
  region net 3V3_BLE: 3981,6237 3981.86,6236.14 4027,6236.14 4027,6161.1 4028,6160.1 4023.9,6156 3980,6156 3980,6182 3977,6185
  region net 3V3_BLE: 4686,6328.11 4687.89,6330 4809,6330 4809,6248 4808,6247 4806,6249 4725,6249 4725,6299 4718,6306 4682,6306
  region net 1V5_NORMAL: 3587,7242 3589,7176 3612,7176 3639.51,7203.51 3658,7222 3658,7241 3657,7242
  region net 3V3_CPU: 3045,7393 3084,7393 3084,7396 3143,7455 3135.02,7462.98 3135.02,7463 3078,7463 3070,7455 3045.87,7455
  region net 1V0: 3571,6843 3572,6844 3686,6844 3686,6748 3687,6747 3684,6744 3557,6744
  region net 3V3_CPU: 3589,7316.98 3589,7289.87 3669.13,7289.87 3671,7292.87 3671,7318.98
  region net +5V_ULTRA: 3474,6138 3472,6136 3472,6092 3459.51,6092 3454,6086.49 3454,6034 3469,6034 3471,6032 3491,6052 3526,6052 3526,6127 3525,6128
  pour cut-out: 2428.82,6701.75 2411.03,6683.95 2411.02,6602.85 2591.89,6602.85 2608.98,6619.95 2608.98,6706.53
Bottom Layer:
  region net NetF1_1: 2163.87,6733 2076,6733 2076,6569 2077,6568 2170.57,6568
GND (plane layer: these items are gaps in the copper):
  rectangle: 4831,5937.32 5138,7390.84
PWR (plane layer: these items are gaps in the copper):
  rectangle: 4831,5937.32 5138,7390.84
  lines w10: 2259,6953 2251,6961 2251,7083 2313.6,7145.6 2539.4,7145.6 2616,7069 2616,6381 2611,6376 2497,6376 ; 2749,7379 2749,6895 2749,6746 2983,6512 2983,6379 2998,6364 3081,6364 3080,6365 3080,6523 2854.93,6748.07 2854.93,6884.81 ; 2854.65,6885.1 2854.65,7074.18 3478.18,7074.18 3488,7084 3488,7164 3483.81,7159.81 2952.21,7159.81 ; 2877,7622 2993,7622 3026,7589 3026,7417 2983.61,7374.61 2983.61,7203.14 ; 3538,7325 3672.74,7325 3686,7311.74 3686,7240.73 ; 3538.81,7325.81 3459,7405.63 3459,7443 3326,7576 3326,7822 3371,7867 3737,7867 3739,7865 3739,7452 3811,7380 3811,7018 ; 3571.29,6735 3680,6735 3701,6756 3701,6908 3811,7018 ; 3573.73,7168.03 3573.73,7083.2 3495,7004.47 3495,6525.87 3450.13,6481 3450.13,6458.13 3436.52,6444.52 3436.52,6392 3574,6392 3576,6394 3576,7007 3684.66,7115.66 ; 3578.83,7168.03 3552.7,7168.03 3534.59,7186.14 3534.59,7246.59 3547.96,7259.96 3666.77,7259.96 3686,7240.73 ; 3686,7120.04 3686,7240.73 ; 3804.6,6045.4 3541.4,6045.4 3497,6001 3441.57,6001 3434.57,6008 3434.57,6138.57 3485,6189 3805,6189 3819,6203 3891,6203 ; 3805,6045 3914,5936 3914,5430 3935,5409 4082,5409 4076,5415 4076,5531 ; 3811,7122 3811,7018 ; 3811,7325 3812.16,7326.16 4229,7326.16 4290,7265.16 4290,7261.16 4290,7181 4101.5,6992.5 ; 4011.89,5943.11 3927,6028 3927,6167 3891,6203 ; 4014,5945.23 4014,5591 4074,5531 ; 4073,5409 4073,5372 4096,5349 ; 4100,6994 4025,6994 4001,7018 3811,7018 ; 4117.9,5898 4221.05,5898 4326,6002.95 4326,6056 ; 4123,5898 4123,6173.68 4045.45,6251.23 3993.23,6251.23 3945,6203 3891,6203 ; 4399.23,6155.65 4527.65,6155.65 4719,6347 4811,6347 4833,6325 4833,5918 ; 2259,6916 2279,6896 2405,6896 2420,6881 2420,6224 2518,6126 2518,6026 2616,5928 2882,5928 2909,5955 3222,5955 3241,5974 3314,5974 3314,6114 3263,6165 2872.08,6165 2866.08,6171 2649,6171 2499,6321 2499,6969 2491,6977 2278.09,6977 2259,6957.91 2259,6916

## Silkscreen, mask and mechanical layers (free items; w line width, h text height)
Top Overlay:
  text "-" at 4147,7731 h60
  text "+" at 3943.1,7728.63 h60
  text "M1 M2 M3 M5 M4" at 3909.55,7373 h30
  text "G" at 3482,7003 h30
  text "RX" at 3567,6989 h30
  text "TX" at 3701,6982 h30
  text "SWS" at 4645,5931 h27.5
  text "3V3" at 4756.1,5930 h27.5
  text "G" at 3252,5668 h27.5
  text "BAT+" at 3054,5664 h27.5
  text "NTC" at 3161.34,5663 h27.5
  text "G" at 3988,5596 h27.5
  text "RX" at 4031,5596 h27.5
  text "5v" at 3934,5594 h27.5
  text "TX" at 4084,5593 h27.5
Mechanical 1:
  circle w0.5: c2914.56,6103.32 r76.77
  circle w0.5: c4371.26,6103.32 r59.06
  circle w0.5: c4371.26,7205.68 r76.77
  circle w0.5: c2914.56,7205.68 r59.06
  circle w0.5: c4371.26,6103.32 r108.27
  circle w0.5: c4371.26,7205.68 r108.27
  circle w0.5: c2914.56,7205.68 r108.27
  circle w0.5: c2914.56,6103.32 r108.27
  circle w0.5: c4932.86,6310.01 r29.53
  circle w0.5: c4932.86,6211.58 r29.53
  circle w0.5: c4932.86,6998.99 r29.53
  circle w0.5: c4932.86,7097.41 r29.53
  pour cut-out: 2939.95,7973.39
  lines w0.5: 2179.5,6110.21 2205.09,6110.21 2205.09,6135.8 2179.5,6135.8 ; 2179.5,6228.32 2205.09,6228.32 2205.09,6253.91 2179.5,6253.91 ; 2179.5,7055.09 2205.09,7055.09 2205.09,7080.68 2179.5,7080.68 ; 2179.5,7173.2 2205.09,7173.2 2205.09,7198.79 2179.5,7198.79 ; 2271.65,6478.51 2005.12,6478.51 2005.12,6830.48 2272.83,6830.48 2272.83,6479.69 ; 5060.23,5926.15 5138.97,6123 ; 5060.23,5926.15 5138.97,6123 ; 5060.23,5926.15 4371.26,5926.15 4267.13,5335.6 2939.95,5335.6 2835.82,5926.15 2107.48,5926.15 2028.74,6123 2028.74,7185.99 2107.48,7382.84 2835.82,7382.84 2939.95,7973.39 4267.13,7973.39 4371.26,7382.84 5060.23,7382.84 5138.97,7185.99 5138.97,6123 ; 2069.27,6093.47 2179.5,6093.47 2179.5,6154.5 2171.63,6154.5 2171.63,6209.62 2179.5,6209.62 2179.5,6270.64 2069.27,6270.64 2069.27,6093.47 ; 2069.27,7038.36 2179.5,7038.36 2179.5,7099.38 2171.63,7099.38 2171.63,7154.5 2179.5,7154.5 2179.5,7215.52 2069.27,7215.52 2069.27,7038.36 ; 2343.7,6290.32 4942.12,6290.32 4942.12,7018.67 2343.7,7018.67 2343.7,6290.32
  lines w1: 4818,6953 5137.97,6953 ; 4819,5926.15 4819,7382.84 ; 4819,6367 5139,6367